# EAGLE board project_vostok_(tv_b_gone_extended) (EAGLE 8.5.0)

Size 101 x 58 mm. Coordinates in mm from the lower left corner, seen from the top.
Outline: 0,0 100,0 101,58 0,58 0,0
Copper layers (1*16): Top 0.035559375mm / dielectric 1.6mm / Bottom 0.035559375mm
Design rules "oshpark-2layer": minimum track width 6mil, minimum drill 10mil, track to track 6mil, track to pad 6mil, pad to pad 6mil, via to via 6mil, smd to smd 6mil, copper to edge 15mil, drill to drill 6mil, minimum pad ring 5mil, minimum via ring 5mil, stop-mask expansion 2.5mil, vias tented up to drill 0mil, thermal gap 10mil

## Footprints (pad centres in the part's own frame; a part is rotated, then mirrored left to right if it is on the bottom)
2468 = drill 1.02 pad 1.53: 1 23.625,-6.35; 2 23.625,6.35 | drill 3.45 pad 3.45: 3 -14.985,2.35; 4 14.985,-2.35
C025-025X050 = drill 0.813 pad 1.676 octagon: 1 -1.27,0; 2 1.27,0
DIP254P1524X483-40 = drill 0.991 pad 1.486 square: 1 -15.24,48.26 | drill 0.991 pad 1.486: 2 -15.24,45.72; 3 -15.24,43.18; 4 -15.24,40.64; 5 -15.24,38.1; 6 -15.24,35.56; 7 -15.24,33.02; 8 -15.24,30.48; 9 -15.24,27.94; 10 -15.24,25.4; 11 -15.24,22.86; 12 -15.24,20.32; 13 -15.24,17.78; 14 -15.24,15.24; 15 -15.24,12.7; 16 -15.24,10.16; 17 -15.24,7.62; 18 -15.24,5.08; 19 -15.24,2.54; 20 -15.24,0; 21 0,0; 22 0,2.54; 23 0,5.08; 24 0,7.62; 25 0,10.16; 26 0,12.7; 27 0,15.24; 28 0,17.78; 29 0,20.32; 30 0,22.86; 31 0,25.4; 32 0,27.94; 33 0,30.48; 34 0,33.02; 35 0,35.56; 36 0,38.1; 37 0,40.64; 38 0,43.18; 39 0,45.72; 40 0,48.26
SOT230P700X180-4N = smd 1.95 x 0.95: 1 -3.05,2.3; 2 -3.05,0; 3 -3.05,-2.3 | smd 1.95 x 3.2: 4 3.05,0
ISP6 = drill 1.016 pad 1.778 octagon: 1 -2.54,-1.27; 2 -2.54,1.27; 3 0,-1.27; 4 0,1.27; 5 2.54,-1.27; 6 2.54,1.27
5MM-SIDE = smd 1.651 x 5.08: A -1.27,0; K 1.27,0 | smd 1.651 x 5.08 bottom: A2 -1.27,0; K2 1.27,0
2X05 = drill 1.016 octagon: 1 -5.08,-1.27; 2 -5.08,1.27; 3 -2.54,-1.27; 4 -2.54,1.27; 5 0,-1.27; 6 0,1.27; 7 2.54,-1.27; 8 2.54,1.27; 9 5.08,-1.27; 10 5.08,1.27
TO92-CBE = drill 0.813 long: B 0,0; C 2.54,0; E -2.54,0
0204/5 = drill 0.813 octagon: 1 -2.54,0; 2 2.54,0
0204/7 = drill 0.813 octagon: 1 -3.81,0; 2 3.81,0
1825910-6 = drill 1 pad 1.5: 1 3.25,2.25; 2 3.25,-2.25; 3 -3.25,2.25; 4 -3.25,-2.25
TO92 = drill 0.813 octagon: 1 1.27,0; 2 0,1.905; 3 -1.27,0
PEC12R-4XXXF-SXXXX_1 = drill 1.2 pad 1.8: 1 -2.5,-7.5; 2 2.5,-7.5; 3 0,-7.5; 4 -2.5,7; 5 2.5,7 | drill 3.28 pad 4.8: 6 5.6,0; 7 -5.6,0
CERM_OSC = drill 0.9 pad 1.676: P$1 -2.54,0; P$2 0,0; P$3 2.54,0

## Placement (x,y rotation side)
BAT_1  2468  [2468]  43.36,41.44 0 bottom
BAT_2  2468  [2468]  43.36,15.37 0 bottom
C1  100nF  [C025-025X050]  46.99,6.79 0 top
C2  100nF  [C025-025X050]  46.99,29.63 180 top
IC1  ATMEGA644PV-10PU  [DIP254P1524X483-40]  22.86,9.3 270 top
IC2  MCP1825S-3302E_DB  [SOT230P700X180-4N]  40,48 180 top
ICSP  PINHD-2X3THM  [ISP6]  60.22,48.6 0 top
LED1  LED  [5MM-SIDE]  5.35,32.33 90 top
LED2  LED  [5MM-SIDE]  5.35,22.33 90 top
LED3  LED  [5MM-SIDE]  5.35,44 90 top
LED4  LED  [5MM-SIDE]  5.35,9 90 top
PORTA  [2X05]  23.52,36.49 90 top
PORTC  [2X05]  77.52,36.49 90 top
Q5  MPS2907A  [TO92-CBE]  12,6 270 top
R1  [0204/5]  46,37 90 top
R2  [0204/5]  42,37 90 top
R3  [0204/7]  50,38 270 top
S1  1825910-6  [1825910-6]  65,35 90 top
T1  2N3904  [TO92]  12,47 270 top
T2  2N3904  [TO92]  12,36.67 270 top
T3  2N3904  [TO92]  12,26.67 270 top
T4  2N3904  [TO92]  12,16 270 top
U1  PEC11R-4015F-S0024  [PEC12R-4XXXF-SXXXX_1]  89,9 90 top
XTL1  8.0MHz  [CERM_OSC]  34.05,31.45 180 top

## Library data of the parts
BAT_1 BAT_2 = SamacSys_Parts; ALLIED_NUMBER: 70182756; DESCRIPTION: Cylindrical Battery Contacts, Clips, Holders & Springs 2AAA PC MNT HOLDER; HEIGHT: mm; MANUFACTURER_NAME: Keystone Electronics; MANUFACTURER_PART_NUMBER: 2468; RS_PART_NUMBER: 2794965; SUPPLIER_NAME: RS
C1 C2 = rcl-ez
IC1 = SamacSys_Parts; DESCRIPTION: 8-bit Microcontroller with In-System Programmable Flash; HEIGHT: mm; MANUFACTURER_NAME: Microchip; MANUFACTURER_PART_NUMBER: ATMEGA644PV-10PU; RS_PART_NUMBER: 7380491P; SUPPLIER_NAME: RS
IC2 = SamacSys_Parts; ALLIED_NUMBER: 70046538; DESCRIPTION: LDO Regulator 500mA 3.3V SOT223-3 Microchip MCP1825S-3302E/DB, LDO Voltage Regulator, 0.5A, 3.3 V 0.5%, 2.1 6 Vin, 4-Pin SOT-223; HEIGHT: 1.8mm; MANUFACTURER_NAME: Microchip; MANUFACTURER_PART_NUMBER: MCP1825S-3302E/DB; RS_PART_NUMBER: 9115520; SUPPLIER_NAME: RS
ICSP = adaprog
LED1-LED4 = tvbgone
PORTA PORTC = pinhead
Q5 = transistor-pnp
R1 R2 = resistor
R3 = rcl; SPICEPREFIX: R
S1 = SamacSys_Parts; DESCRIPTION: TE CONNECTIVITY / ALCOSWITCH - 1825910-6 - TACT SWITCH, SPST, 0.05A, 24VDC, SOLDER; HEIGHT: mm; MANUFACTURER_NAME: TE Connectivity; MANUFACTURER_PART_NUMBER: 1825910-6; RS_PART_NUMBER: 1613779; SUPPLIER_NAME: RS
T1-T4 = transistor
U1 = SamacSys_Parts; DESCRIPTION: Bourns 24 Pulse Incremental Mechanical Rotary Encoder with a 6 mm Flat Shaft (Not Indexed), Through Hole; HEIGHT: mm; MANUFACTURER_NAME: Bourns; MANUFACTURER_PART_NUMBER: PEC11R-4015F-S0024; RS_PART_NUMBER: 7377739P; SUPPLIER_NAME: RS
XTL1 = digg

## Nets
GND: BAT_1.2 BAT_2.2 C1.2 C2.2 IC1.11 IC1.31 IC2.2 IC2.4 ICSP.6 PORTA.10 PORTC.10 S1.3 S1.4 T1.3 T2.3 T3.3 T4.3 U1.3 U1.5 XTL1.P$2
MISO: IC1.7 ICSP.1
MOSI: IC1.6 ICSP.4
N$7: Q5.B R2.2
N$10: IC1.5
N$11: IC1.14
N$12: IC1.15
N$13: IC1.16
N$14: IC1.17
N$15: IC1.18
N$16: IC1.19
N$17: IC1.20
N$18: IC1.32
N$19: IC1.21
PA0: IC1.40 PORTA.1
PA1: IC1.39 PORTA.2
PA2: IC1.38 PORTA.3
PA3: IC1.37 PORTA.4
PA4: IC1.36 PORTA.5
PA5: IC1.35 PORTA.6
PA6: IC1.34 PORTA.7
PA7: IC1.33 PORTA.8
PB0: IC1.1 U1.1
PB1: IC1.2 U1.2
PB2: IC1.3 R1.1 U1.4
PB3: IC1.4 R2.1
PC0: IC1.22 PORTC.1
PC1: IC1.23 PORTC.2
PC2: IC1.24 PORTC.3
PC3: IC1.25 PORTC.4
PC4: IC1.26 PORTC.5
PC5: IC1.27 PORTC.6
PC6: IC1.28 PORTC.7
PC7: IC1.29 PORTC.8
Q5_E: Q5.C T1.2 T2.2 T3.2 T4.2
RESET: IC1.9 ICSP.5 R3.2 S1.1 S1.2
SCK: IC1.8 ICSP.3
T1_C: LED3.K LED3.K2 T1.1
T2_C: LED1.K LED1.K2 T2.1
T3_C: LED2.K LED2.K2 T3.1
T4_C: LED4.K LED4.K2 T4.1
VIN_REG: BAT_1.1 BAT_2.1 IC2.1 LED1.A LED1.A2 LED2.A LED2.A2 LED3.A LED3.A2 LED4.A LED4.A2
VOUT_REG: C1.1 C2.1 IC1.10 IC1.30 IC2.3 ICSP.2 PORTA.9 PORTC.9 Q5.E R1.2 R3.1
XTAL1: IC1.13 XTL1.P$3
XTAL2: IC1.12 XTL1.P$1

## Tracks (layer width: path | path; a pad name or v marks a point on that pad's centre or on a via)
GND  (19 unrouted)
MISO  (1 unrouted)
MOSI  (1 unrouted)
N$7  (1 unrouted)
PA0  (1 unrouted)
PA1  (1 unrouted)
PA2  (1 unrouted)
PA3  (1 unrouted)
PA4  (1 unrouted)
PA5  (1 unrouted)
PA6  (1 unrouted)
PA7  (1 unrouted)
PB0  (1 unrouted)
PB1  (1 unrouted)
PB2  (2 unrouted)
PB3  (1 unrouted)
PC0  (1 unrouted)
PC1  (1 unrouted)
PC2  (1 unrouted)
PC3  (1 unrouted)
PC4  (1 unrouted)
PC5  (1 unrouted)
PC6  (1 unrouted)
PC7  (1 unrouted)
Q5_E  (4 unrouted)
RESET  (4 unrouted)
SCK  (1 unrouted)
T1_C  (2 unrouted)
T2_C  (2 unrouted)
T3_C  (2 unrouted)
T4_C  (2 unrouted)
VIN_REG  (10 unrouted)
VOUT_REG  (10 unrouted)
XTAL1  (1 unrouted)
XTAL2  (1 unrouted)

## Text on the board
tNames: Based upon the TV-B-Gone / By Mitch Altman | Anton Nikitin / Project Vostok / 2018 Version 1 | ATMega644P